# Altium PCB CVC_channel.PcbDoc
Units mm, origin at the board's own origin, x right, y up, seen from the top; angles counter-clockwise.
Board outline 24 x 90 mm, 2 copper layers (Top Layer, Bottom Layer); 14 components, 10 nets, 40 pads, 8 vias.
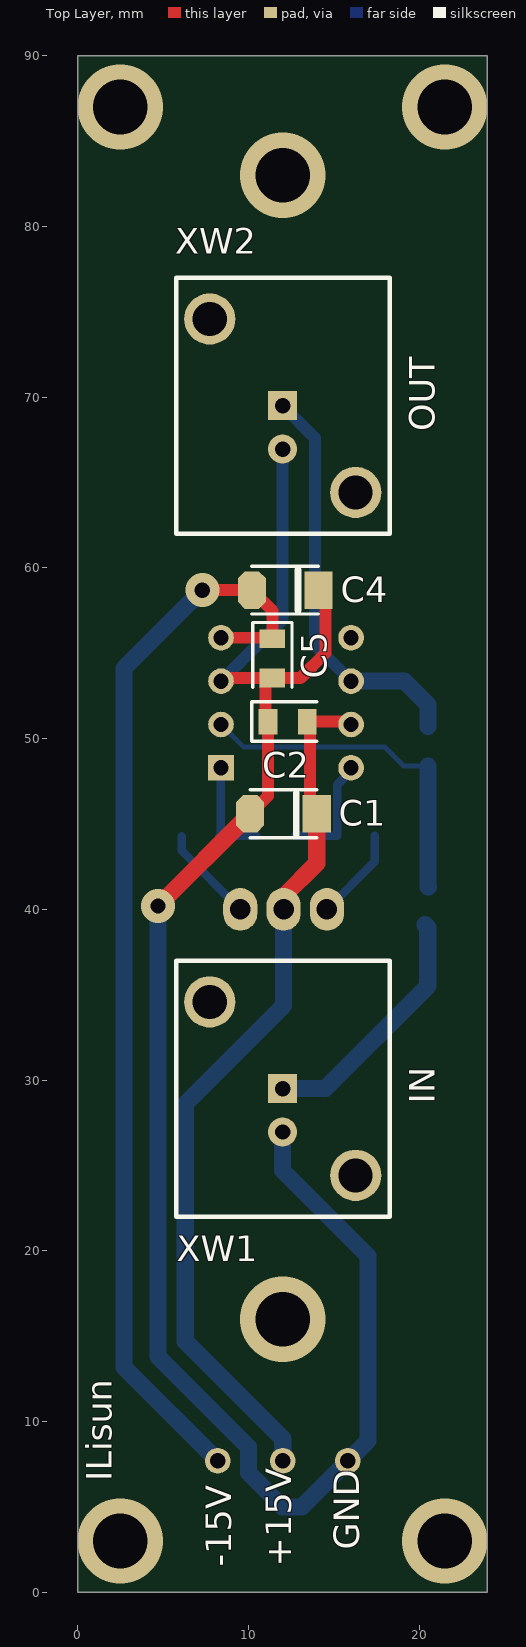
[diagram p0: Top Layer view]
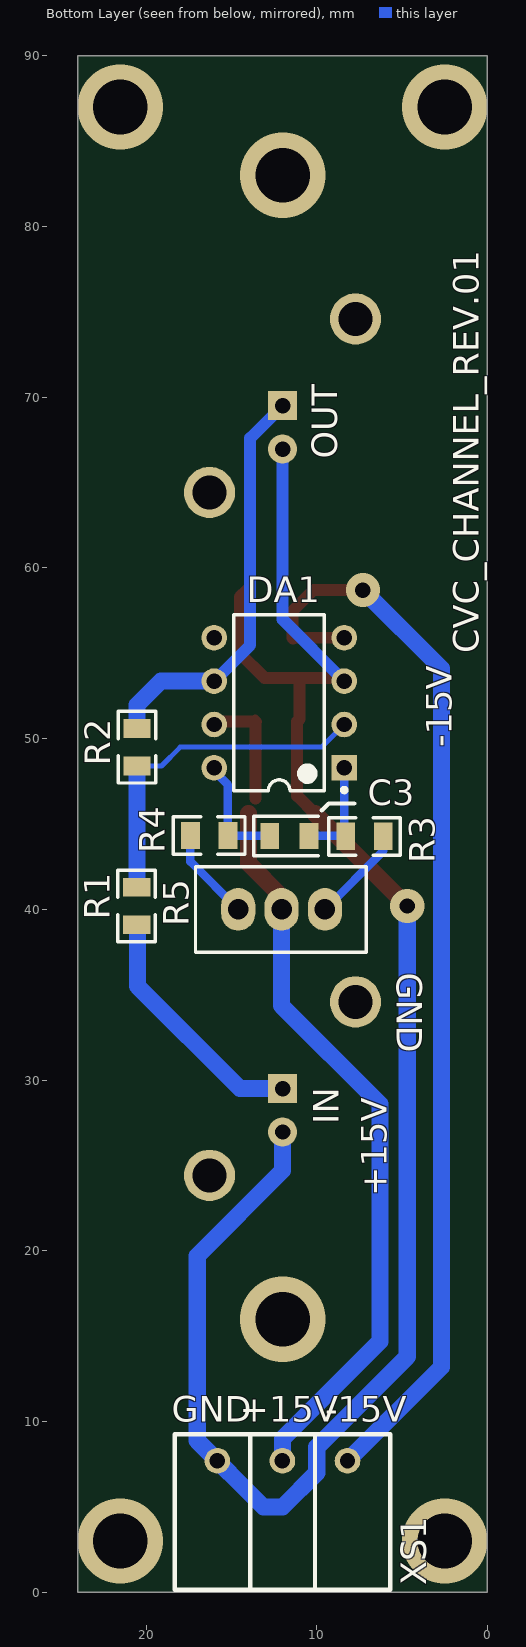
[diagram p1: Bottom Layer view, seen from below]

## Layer stack, top to bottom
Top Layer: signal copper 0.0356
Dielectric: dielectric 0.32, FR-4, Dk 4.8
Bottom Layer: signal copper 0.0356

## Board outline
0,0 0,90 24,90 24,0

## Design rules (kind name [scope] priority, off if disabled: settings)
Clearance [All] p1: gap=0.254
Height [All] p1: minheight=0 maxheight=40 prefheight=12.7
PolygonConnect [All] p1: connectstyle=Relief reliefconductorwidth=0.254 reliefentries=4 polygonreliefangle="90 Angle"
RoutingVias [All] p1: holewidth=0.711 width=1.27 viastyle="Through Hole" minholewidth=0.711 minwidth=1.27 maxholewidth=0.711 maxwidth=5
SilkscreenOverComponentPads [All] p1: minsilkscreentomaskgap=0.254
SolderMaskExpansion [All] p1: expansion=0.102
Width [All] p1: maxlimit=4 minlimit=0.254 preferedwidth=0.254
26 further rules are at their usual default settings.

## Components (designator, comment, footprint, x,y, rotation, side; value= is the part's Value field where it differs from the comment)
C1 "Tantal B case" B 12,45.6 r0 top
C2 "Конденсатор ЧИП" CC2012-0805 12.3,51 r180 top
C3 "Конденсатор ЧИП" CC2012-0805 11.6,44.3 r0 bottom
C4 "Tantal B case" B 12.1,58.7 r0 top
C5 "Конденсатор ЧИП" CC2012-0805 11.4,54.7 r90 top
DA1 "KR544UD1A" DIP-8 12.2,52.1 r0 bottom
R1 "резистор чип" CR2012-0805 20.525,40.2 r90 bottom
R2 "резистор чип" CR2012-0805 20.5,49.5 r90 bottom
R3 "резистор чип" CR2012-0805 7.2,44.3 r0 bottom
R4 "резистор чип" CR2012-0805 16.3,44.3 r180 bottom
R5 "Trimming Potentiometer" 3296W 14.6,40 r180 bottom
XS1 "Клемма 15EDGRC-3.81-03P (XY2500R)" 15EDGRC-3.81-03P 8.2,7.7 r0 bottom
XW1 "BNC" HYR-0142A 12,29.5 r90 top
XW2 "BNC" HYR-0142A 12,69.5 r90 top

## Footprints (in the part's own frame and the unit in brackets; to place one, negate y for a bottom-side part, rotate by r counter-clockwise, add the part's x,y. Pads: shape width x height; smd on the part's side, far side on the other; paste and mask are expansions set on the pad)
15EDGRC-3.81-03P [mm] "XY2500R - клемма контакная угловая"
  round 1.5 hole 0.9: 1(0,0) 2(3.81,0) 3(7.62,0)
  silkscreen extent -2.5,-1.55 10.12,7.55
3296W [mm]
  oval 2x2.5 hole 1.2: 1(0,0) 2(2.54,0) 3(5.08,0)
  silkscreen extent -2.5,-2.5 7.5,2.5
B [mm]
  oct 1.65x2.2 smd: 1(-1.9,0)
  rect 1.65x2.2 smd: 2(2,0)
  silkscreen extent -1.9,-1.4 2,1.4
CC2012-0805 [mm]
  rect 1.1x1.5 smd: 1(-1.15,0) 2(1.15,0)
  silkscreen extent -1.7,-1.15 2.1,1.15
CR2012-0805 [mm]
  rect 1.1x1.6 smd: 1(-1.1,0.025) 2(1.1,0.025)
  silkscreen extent -2.1,-1.07 2.1,1.12
DIP-8 [mm]
  rect 1.5x1.5 hole 0.9: 1(-3.81,3.81)
  round 1.5 hole 0.9: 2(-3.81,1.27) 3(-3.81,-1.27) 4(-3.81,-3.81) 5(3.81,-3.81) 6(3.81,-1.27) 7(3.81,1.27) 8(3.81,3.81)
  silkscreen extent -3.93,-5.15 2.65,5.23, body extent -3.6,-5.15 3.6,5.15, height 5.08
HYR-0142A [mm] "BNC connector"
  rect 1.7x1.7 hole 0.9: 1(0,0)
  round 1.7 hole 0.9: 2(-2.54,0)
  round 3 hole 2: 3(-5.08,-4.28) 3(5.08,4.27)
  silkscreen extent -7.5,-6.28 7.5,6.22

## Part data
C1 C4: "Конденсатор танталовый LowESR"
C2 C3 C5: "Чип конденсатор"
R1 R2 R3 R4: library part "Резистор ЧИП"
R5: library part "Резистор переменный 3296W"
XW1 XW2: "BNC Elbow Connector"

## Via types
v1: diameter 5, hole 3.2, Top Layer to Bottom Layer, 6 vias
v2: diameter 2, hole 0.9, Top Layer to Bottom Layer, 2 vias

## Nets (pads, with @x,y where several pads share a name; then routed paths per layer and width w, separated by ;. In a path a pad name is that pad's centre, name@x,y a point inside that pad or via, vN(x,y) a via of type N, cw(c..) or ccw(c..) an arc to the next point about the centre after c; other vN are vias at no path point)
+15V: C1.2 C2.1 DA1.7 R5.2 XS1.2 | length 50.8
  Top Layer w0.5: C2.1 13.6,51 C2.1@13.6,51.15 ; DA1.7@15.84,51 DA1.7
  Top Layer w0.7: C1.2@13.6,46.5 13.6,51 DA1.7@15.84,51
  Top Layer w1: R5.2 12.06,40.76 14,42.7 C1.2
  Bottom Layer w1: 6.3,27 6.3,28.6 12.06,34.36 R5.2 ; 6.3,27.1 6.3,14.7 12.01,8.99 XS1.2
-15V: C4.1 C5.2 DA1.4 XS1.1 | length 64.5
  Top Layer w0.7: v2(7.3,58.7) C4.1 11.41,57.49 11.41,55.91 C5.2@11.34,55.91 ; DA1.4 C5.2@11.34,55.91 ; C5.2 C5.2@11.34,55.91
  Bottom Layer w1: v2(7.3,58.7) 2.7,54.1 2.7,13.2 XS1.1
GND: C1.1 C2.2 C4.2 C5.1 DA1.3 XS1.3 XW1.2 XW2.2 | length 107.2
  Top Layer w0.7: DA1.3 8.57,53.55 C5.1 ; C1.1 11.15,46.65 C2.2 11,51.15 11,53.55 13.05,53.55 14.5,55 14.5,58.3 C4.2
  Top Layer w1: v2(4.7,40.2) C1.1
  Bottom Layer w0.7: DA1.3 12,56.98 XW2.2
  Bottom Layer w1: v2(4.7,40.2) 4.7,13.8 10,8.5 10,7 12,5 13.12,5 17,8.88 17,19.7 12,24.7 XW1.2
IN_3: DA1.2 R1.2 R2.1 | length 20.2
  Bottom Layer w0.3: DA1.2 9.72,49.5 18,49.5 19.1,48.4 R2.1@20.5,48.4
  Bottom Layer w1: R2.1 20.525,41.325 R1.2
NetC3_1: C3.1 DA1.1 R3.2 | length 6.2
  Bottom Layer w0.5: R3.2 R3.2@8.325,44.3 ; DA1.1 8.39,44.365 R3.2@8.325,44.3 ; C3.1 R3.2@8.325,44.3
NetC3_2: C3.2 DA1.8 R4.2 | length 6.8
  Bottom Layer w0.5: C3.2 12.775,44.325 R4.2 15.2,47.3 16.01,48.11 DA1.8
NetR1_1: R1.1 XW1.1 | length 14.6
  Bottom Layer w1: XW1.1 14.5,29.5 20.5,35.5 20.5,38.95 R1.1@20.35,39.1
NetR3_1: R3.1 R5.3 | length 5.7
  Bottom Layer w0.5: R3.1 6.1,43.42 R5.3
NetR4_1: R4.1 R5.1 | length 5.5
  Bottom Layer w0.5: R5.1 17.4,42.8 R4.1
OUT_3: DA1.6 R2.2 XW2.1 | length 24.2
  Bottom Layer w0.7: XW2.1 13.9,67.6 13.9,55.48 DA1.6
  Bottom Layer w1: DA1.6 19.13,53.37 20.525,51.975 R2.2@20.525,50.7
pads on no net: DA1.5 XW1.3 XW2.3
copper on no net:
  other v1: 2.5,3 21.5,3 12,16 12,83 2.5,87 21.5,87

## Silkscreen, mask and mechanical layers (free items; w line width, h text height)
Top Overlay:
  text "OUT" at 20.9,68 h1.5 r90
  text "IN" at 20.9,28.6 h1.5 r90
  text "ILisun" at 2,6.5 h1.5 r90
  text "GND" at 16.5,2.5 h1.5 r90
  text "-15V" at 9,1.5 h1.5 r90
  text "+15V" at 12.5,1.5 h1.5 r90
Bottom Overlay:
  lines w0.254: 7.8,46.2 9.3,46.2 9.7,45.8
  text "OUT" at 8.8,66.4 h1.5 r270
  text "CVC_CHANNEL_REV.01" at 0.5,55 h1.5 r270
  text "-15V" at 2.1,49.5 h1.5 r270
  text "GND" at 5.3,36.3 h1.5 r90
  text "IN" at 8.7,27.4 h1.5 r270
  text "+15V" at 5.9,23.2 h1.5 r270
  text "-15V" at 9.5,10 h1.5
  text "+15V" at 14.5,10 h1.5
  text "GND" at 18.5,10 h1.5
Mechanical 1:
  the board outline again, w0.5

## Dimensions
18.5,9.5 to 12,16 on Mechanical 15
24,0 to 12,29.5 on Mechanical 15
24,90 to 12,69.5 on Mechanical 15
12,29.5 to 12,16 on Mechanical 15
12,69.5 to 12,83 on Mechanical 15
12,69.5 to 12,29.5 on Mechanical 15
0,90 to 12,83 on Mechanical 15
0,90 to 12,69.5 on Mechanical 15
0,90 to 12,83 on Mechanical 15
0,0 to 12,16 on Mechanical 15
0,0 to 12,16 on Mechanical 15
0,0 to 12,29.5 on Mechanical 15
0,0 to 24,0 on Mechanical 15
0,0 to 0,90 on Mechanical 15
12,83 to 18.28,77 on Mechanical 15
12,69.5 to 24,90 on Mechanical 15
12,16 to 18.28,22 on Mechanical 15